# Altium PCB Microneedle_Patch_Mirrored - Copy.PcbDoc
Units mil, origin at the board's own origin, x right, y up, seen from the top; angles counter-clockwise.
Board outline 1133.86 x 3661.42 mil, 2 copper layers (Top, Bottom), stack 5.394 mil thick; 33 components, 33 nets, 708 pads, 44 vias.
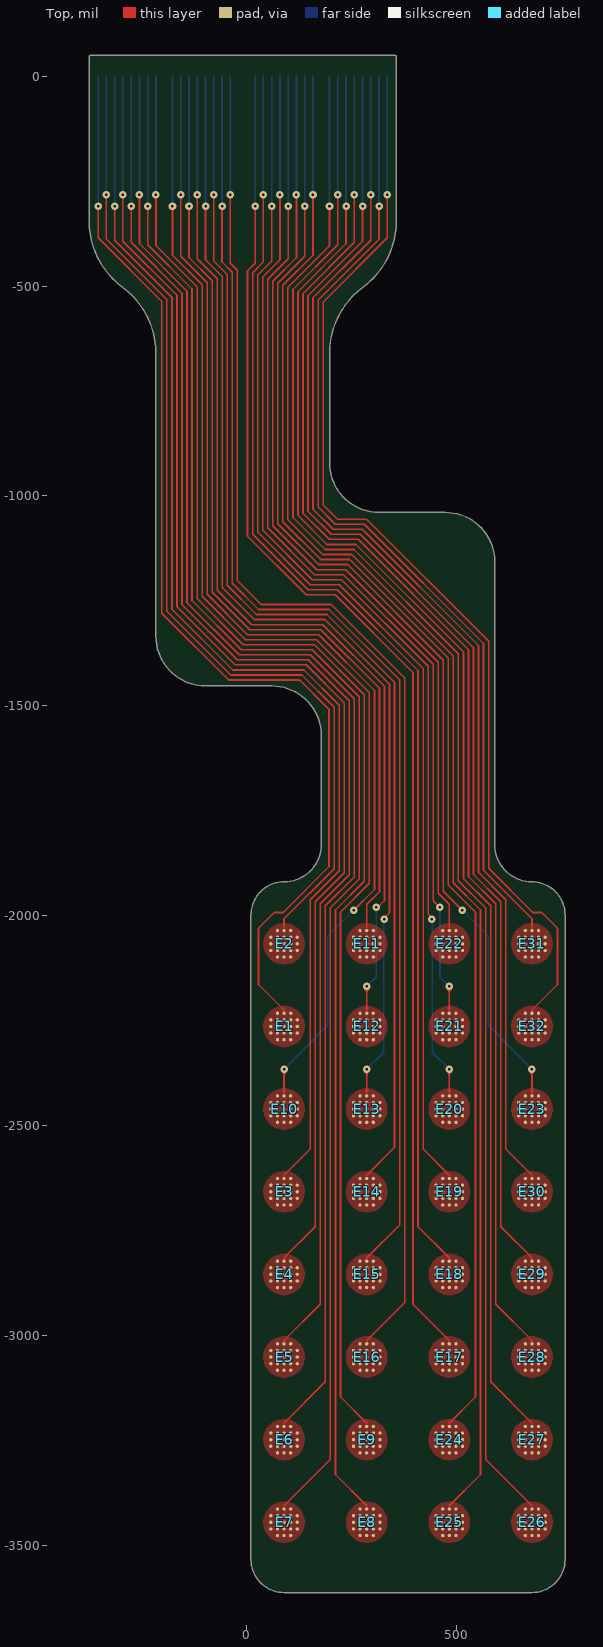
[diagram p0: Top view]
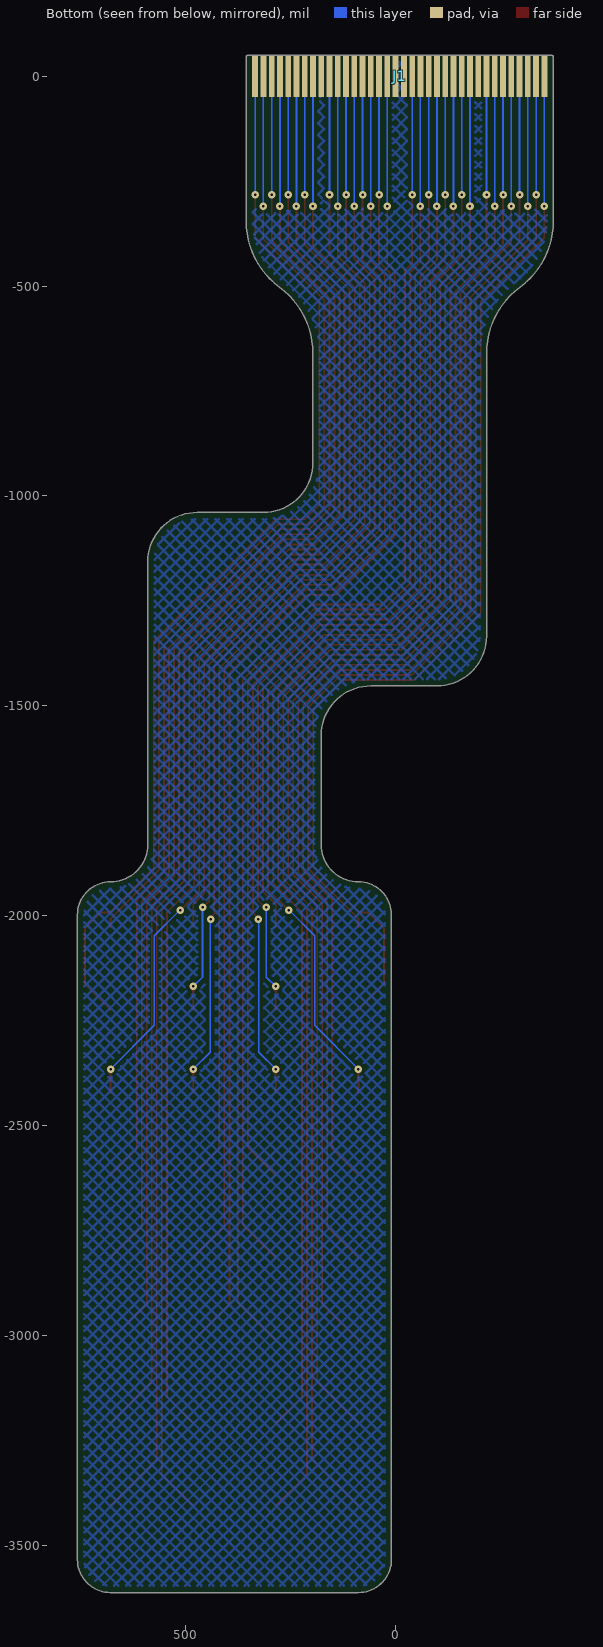
[diagram p1: Bottom view, seen from below]
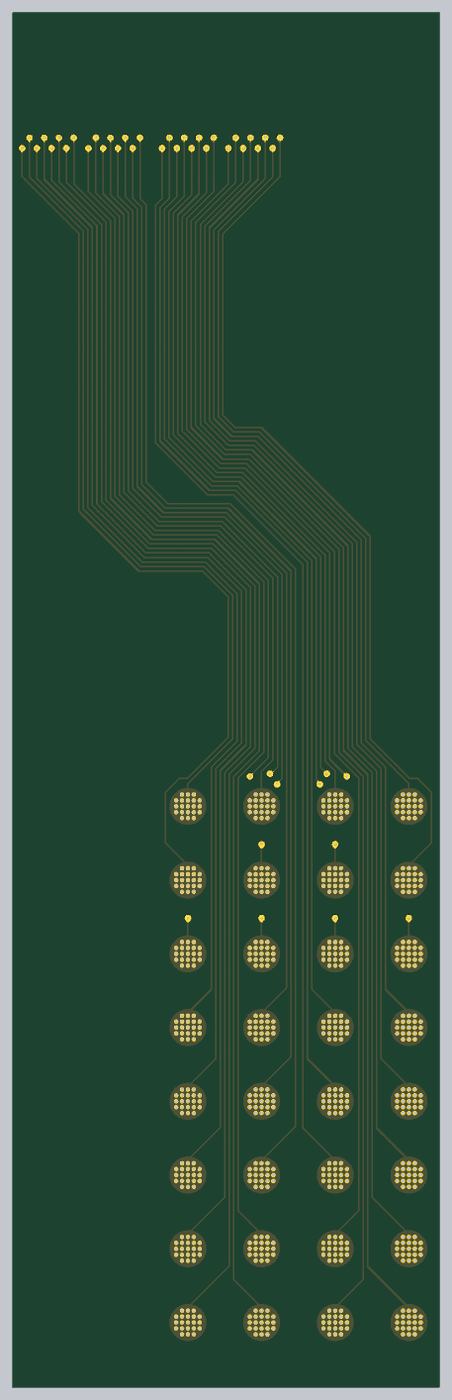
[diagram p2: 3D render of the assembled board from above, using the file's embedded part models]

## Layer stack, top to bottom
Board Layer Stack Top Coverlay: solder mask 0.9843, Polymide, Dk 3.4
Adhesive 3: prepreg 0.9843, Adhesive, Dk 3.3
Top: signal copper 0.7087
Dielectric 1: core 0.5118, Composite dielectric, Dk 3.3
Dielectric 3: core 0.9843, Polymide, Dk 3.4
Dielectric 2: core 0.5118, Composite dielectric, Dk 3.3
Bottom: signal copper 0.7087
Adhesive 2: prepreg 0.9843, Adhesive, Dk 3.3
Board Layer Stack Bottom Coverlay: solder mask 0.9843, Polymide, Dk 3.4

## Board outline
88.58,-3612.2 cw(c88.58,-3533.46) 9.84,-3533.46 9.84,-1998.03 cw(c88.58,-1998.03) 88.58,-1919.29 ccw(c88.58,-1830.71) 177.17,-1830.71 177.17,-1570.62 ccw(c59.06,-1570.62) 59.06,-1452.51 -98.43,-1452.51 cw(c-98.43,-1334.39) -216.54,-1334.39 -216.54,-660.92 ccw(c-413.39,-660.92) -296.26,-502.7 cw(c-179.13,-344.49) -375.98,-344.49 -375.98,45.28 cw(c-372.05,45.28) -372.05,49.21 352.36,49.21 cw(c352.36,45.28) 356.3,45.28 356.3,-344.49 cw(c159.45,-344.49) 276.57,-502.7 ccw(c393.7,-660.92) 196.85,-660.92 196.85,-921.01 ccw(c314.96,-921.01) 314.96,-1039.12 472.44,-1039.12 cw(c472.44,-1157.23) 590.55,-1157.23 590.55,-1830.71 ccw(c679.13,-1830.71) 679.13,-1919.29 cw(c679.13,-1998.03) 757.87,-1998.03 757.87,-3533.46 cw(c679.13,-3533.46) 679.13,-3612.2

## Design rules (kind name [scope] priority, off if disabled: settings)
BoardOutlineClearance ZIF_BoardEdge [InPadClass('ZIF_Pads')] p1: gap=12 ignorepadtopadclearanceinfootprint=FALSE except(0: SMDPad-OutlineEdge)
BoardOutlineClearance [All] p2: gap=12 ignorepadtopadclearanceinfootprint=FALSE
Clearance [All] p1: gap=8 ignorepadtopadclearanceinfootprint=TRUE except(5: Arc-SMDPad Track-SMDPad SMDPad-SMDPad)
ComponentClearance [All] p1: gap=4 collisioncheckmode=3 verticalgap=4 showdistances=FALSE
HoleSize [All] p1: absolutevalues=TRUE maxlimit=1000 minlimit=4 maxpercent=80.000 minpercent=20.000
HoleToHoleClearance [All] p1: gap=10 allowstackedmicrovias=FALSE
MinimumSolderMaskSliver [All] p1: minsoldermaskwidth=3.94
PlaneClearance [All] p1: clearance=6
PlaneConnect [All] p1: pad.planeconnectstyle=Relief pad.reliefexpansion=20 pad.reliefentries=4 pad.reliefconductorwidth=10 pad.reliefairgap=10 via.planeconnectstyle=Direct via.reliefexpansion=20 via.reliefentries=4 via.reliefconductorwidth=10 via.reliefairgap=10
PolygonConnect [All] p1: thpad.connectstyle=Relief thpad.reliefconductorwidth=10 thpad.reliefentries=4 thpad.polygonreliefangle="90 Angle" thpad.airgapwidth=10 smdpad.connectstyle=Direct smdpad.reliefconductorwidth=10 smdpad.reliefentries=4 smdpad.polygonreliefangle="90 Angle" smdpad.airgapwidth=10 via.connectstyle=Direct via.reliefconductorwidth=10 via.reliefentries=4 via.polygonreliefangle="90 Angle" via.airgapwidth=10
RoutingVias [All] p1: holewidth=6 width=18 viastyle="Through Hole" minholewidth=6 minwidth=18 maxholewidth=6 maxwidth=18
SilkToSilkClearance [All] p1: silktosilkclearance=4
SilkToSolderMaskClearance [IsPad] p1: minsilkscreentomaskgap=2 clearancetoexposedcopper=FALSE
SolderMaskExpansion [All] p1: expansion=2 istentingtop=FALSE
SupplyNets "Schematic Supply Nets" [InNet('GND')] p1: voltage=0.000
Width [All] p1: maxlimit=4 minlimit=4 preferedwidth=4 minimp=50.000000 maximp=50.000000 favimp=50.000000
22 further rules are at their usual default settings.

## Classes and differential pairs
pad class ZIF_Pads: J1-1 J1-2 J1-3 J1-4 J1-5 J1-6 J1-7 J1-8 J1-9 J1-10 J1-11 J1-12 J1-13 J1-14 J1-15 J1-16 J1-17 J1-18 J1-19 J1-20 J1-21 J1-22 J1-23 J1-24 J1-25 J1-26 J1-27 J1-28 J1-29 J1-30 J1-31 J1-32 J1-33 J1-34 J1-35 J1-36
component class Main: E1 E2 E4 E6 E27

## Components (designator, comment, footprint, x,y, rotation, side; value= is the part's Value field where it differs from the comment)
E1 "2.5 mm" PCBComponent_1 88.58,-2263.78 r0 top
E2 "2.5 mm" PCBComponent_1 88.58,-2066.93 r0 top
E3 "2.5 mm" PCBComponent_1 88.58,-2657.48 r0 top
E4 "2.5 mm" PCBComponent_1 88.58,-2854.33 r0 top
E5 "2.5 mm" PCBComponent_1 88.58,-3051.18 r0 top
E6 "2.5 mm" PCBComponent_1 88.58,-3248.03 r0 top
E7 "2.5 mm" PCBComponent_1 88.58,-3444.88 r0 top
E8 "2.5 mm" PCBComponent_1 285.43,-3444.88 r0 top
E9 "2.5 mm" PCBComponent_1 285.43,-3248.03 r0 top
E10 "2.5 mm" PCBComponent_1 88.58,-2460.63 r0 top
E11 "2.5 mm" PCBComponent_1 285.43,-2066.93 r0 top
E12 "2.5 mm" PCBComponent_1 285.43,-2263.78 r0 top
E13 "2.5 mm" PCBComponent_1 285.43,-2460.63 r0 top
E14 "2.5 mm" PCBComponent_1 285.43,-2657.48 r0 top
E15 "2.5 mm" PCBComponent_1 285.43,-2854.33 r0 top
E16 "2.5 mm" PCBComponent_1 285.43,-3051.18 r0 top
E17 "2.5 mm" PCBComponent_1 482.28,-3051.18 r0 top
E18 "2.5 mm" PCBComponent_1 482.28,-2854.33 r0 top
E19 "2.5 mm" PCBComponent_1 482.28,-2657.48 r0 top
E20 "2.5 mm" PCBComponent_1 482.28,-2460.63 r0 top
E21 "2.5 mm" PCBComponent_1 482.28,-2263.78 r0 top
E22 "2.5 mm" PCBComponent_1 482.28,-2066.93 r0 top
E23 "2.5 mm" PCBComponent_1 679.13,-2460.63 r0 top
E24 "2.5 mm" PCBComponent_1 482.28,-3248.03 r0 top
E25 "2.5 mm" PCBComponent_1 482.28,-3444.88 r0 top
E26 "2.5 mm" PCBComponent_1 679.13,-3444.88 r0 top
E27 "2.5 mm" PCBComponent_1 679.13,-3248.03 r0 top
E28 "2.5 mm" PCBComponent_1 679.13,-3051.18 r0 top
E29 "2.5 mm" PCBComponent_1 679.13,-2854.33 r0 top
E30 "2.5 mm" PCBComponent_1 679.13,-2657.48 r0 top
E31 "2.5 mm" PCBComponent_1 679.13,-2066.93 r0 top
E32 "2.5 mm" PCBComponent_1 679.13,-2263.78 r0 top
J1 "XF2M-3615-1A" CONN_FPC_2X18_0MM5 -9.84,0 r0 bottom

## Footprints (in the part's own frame and the unit in brackets; to place one, negate y for a bottom-side part, rotate by r counter-clockwise, add the part's x,y. Pads: shape width x height; smd on the part's side, far side on the other; paste and mask are expansions set on the pad)
CONN_FPC_2X18_0MM5 [mm] "Compatible with XF2M-3615-1A / 0.5 mm pitch, 2X18"
  rect 0.35x2.5 smd mask+0: 1(-8.75,0) 2(-8.25,0) 3(-7.75,0) 4(-7.25,0) 5(-6.75,0) 6(-6.25,0) 7(-5.75,0) 8(-5.25,0) 9(-4.75,0) 10(-4.25,0) 11(-3.75,0) 12(-3.25,0) 13(-2.75,0) 14(-2.25,0) 15(-1.75,0) 16(-1.25,0) 17(-0.75,0) 18(-0.25,0) 19(0.25,0) 20(0.75,0) 21(1.25,0) 22(1.75,0) 23(2.25,0) 24(2.75,0) 25(3.25,0) 26(3.75,0) 27(4.25,0) 28(4.75,0) 29(5.25,0) 30(5.75,0) 31(6.25,0) 32(6.75,0) 33(7.25,0) 34(7.75,0) 35(8.25,0) 36(8.75,0)
PCBComponent_1 [mm]
  round 0.2 smd paste+0 mask+0.05: 1(-0.8,-0.4) 1(-0.8,0) 1(-0.8,0.4) 1(-0.4,-0.8) 1(-0.4,-0.4) 1(-0.4,0) 1(-0.4,0.4) 1(-0.4,0.8) 1(0,-0.8) 1(0,-0.4) 1(0,0) 1(0,0.4) 1(0,0.8) 1(0.4,-0.8) 1(0.4,-0.4) 1(0.4,0) 1(0.4,0.4) 1(0.4,0.8) 1(0.8,-0.4) 1(0.8,0) 1(0.8,0.4)
  body extent -0.82,-0.82 0.82,0.82, height 0.4

## Part data
E1 E2 E3 E4 E5 E6 E7 E8 E9 E10 E11 E12 E13 E14 E15 E16 E17 E18 E19 E20 E21 E22 E23 E24 E25 E26 E27 E28 E29 E30 E31 E32: library part SENSE_UNEEDLE, "Microneedle electrode - 2.5 mm diameter"
J1: library part CONN_FPC_2X18_0MM5, "FPC Connector - FPC Side. 0.5 mm pitch / Compatible with XF2M-3615-1A", GRAMS Lib Spec=2.7

## Via types
v1: diameter 18, hole 6, Top to Bottom, 44 vias

## Nets (pads, with @x,y where several pads share a name; then routed paths per layer and width w, separated by ;. In a path a pad name is that pad's centre, name@x,y a point inside that pad or via, vN(x,y) a via of type N, cw(c..) or ccw(c..) an arc to the next point about the centre after c; other vN are vias at no path point)
GND: J1.9 J1.18 J1.19 J1.28
Input1: E1.1 J1.1 | length 2658.7
  Top w4: v1(-354.33,-310.2) -354.33,-385.26 -202.54,-537.05 -202.54,-1279.11 -43.14,-1438.51 126.17,-1438.51 191.87,-1504.2 195.84,-1508.17 195.84,-1882.9 86.5,-1992.24 65.27,-1992.24 27.84,-2029.67 27.84,-2163.67 88.58,-2224.41
  Bottom w4: v1(-354.33,-310.2) J1.1
Input2: E2.1 J1.2 | length 2400.9
  Top w4: v1(-334.65,-282.2) -334.65,-387.97 -190.54,-532.08 -190.54,-1274.14 -38.17,-1426.51 131.15,-1426.51 207.86,-1503.22 207.86,-1887.85 88.58,-2007.13 88.58,-2027.56
  Bottom w4: v1(-334.65,-282.2) J1.2
Input3: E3.1 J1.3 | length 2993.2
  Top w4: v1(-314.96,-310.2) -314.96,-390.69 -178.54,-527.11 -178.54,-1269.17 -33.2,-1414.51 136.12,-1414.51 219.86,-1498.25 219.86,-1892.82 151.01,-1961.67 151.01,-2555.69 88.58,-2618.11
  Bottom w4: v1(-314.96,-310.2) J1.3
Input4: E4.1 J1.4 | length 3191.8
  Top w4: v1(-295.28,-282.2) -295.28,-393.4 -166.54,-522.14 -166.54,-1264.2 -28.23,-1402.51 141.09,-1402.51 231.86,-1493.28 231.86,-1897.79 163.01,-1966.64 163.01,-2740.54 88.58,-2814.96
  Bottom w4: v1(-295.28,-282.2) J1.4
Input5: E5.1 J1.5 | length 3390.5
  Top w4: v1(-275.59,-310.2) -275.59,-396.12 -154.54,-517.17 -154.54,-1259.23 -23.26,-1390.51 146.06,-1390.51 243.86,-1488.31 243.86,-1902.76 175.01,-1971.61 175.01,-2925.39 88.58,-3011.81
  Bottom w4: v1(-275.59,-310.2) J1.5
Input6: E6.1 J1.6 | length 3589.1
  Top w4: v1(-255.91,-282.2) -255.91,-387.97 -255.91,-398.83 -142.54,-512.2 -142.54,-1254.26 -18.29,-1378.51 151.03,-1378.51 255.86,-1483.34 255.86,-1907.73 187.01,-1976.58 187.01,-3110.24 88.58,-3208.66
  Bottom w4: v1(-255.91,-282.2) J1.6
Input7: E7.1 J1.7 | length 3787.8
  Top w4: v1(-236.22,-310.2) -236.22,-390.69 -236.22,-401.55 -130.54,-507.23 -130.54,-1249.29 -13.32,-1366.51 156,-1366.51 267.86,-1478.37 267.86,-1912.7 199.01,-1981.56 199.01,-3295.09 88.58,-3405.51
  Bottom w4: v1(-236.22,-310.2) J1.7
Input8: E8.1 J1.8 | length 3769.7
  Top w4: v1(-216.54,-282.2) -216.54,-404.26 -118.54,-502.26 -118.54,-1244.32 -8.35,-1354.51 160.97,-1354.51 279.86,-1473.4 279.86,-1917.68 211.01,-1986.53 211.01,-3331.09 285.43,-3405.51
  Bottom w4: v1(-216.54,-282.2) J1.8
Input9: E9.1 J1.10 | length 3556.5
  Top w4: v1(-177.17,-310.2) -177.17,-426.66 -106.54,-497.29 -106.54,-1239.35 -3.38,-1342.51 165.94,-1342.51 291.86,-1468.42 291.86,-1922.65 223.01,-1991.5 223.01,-3146.24 285.43,-3208.66
  Bottom w4: v1(-177.17,-310.2) J1.10
Input10: E10.1 J1.11 | length 2801.5
  Top w4: v1(-157.48,-282.2) -157.48,-429.38 -94.54,-492.32 -94.54,-1234.38 1.59,-1330.51 170.91,-1330.51 303.86,-1463.45 303.86,-1937.52 v1(254.46,-1986.92) ; 88.58,-2421.26 88.58,-2365.46 v1(88.84,-2365.2)
  Bottom w4: v1(-157.48,-282.2) J1.11 ; v1(88.84,-2365.2) 192.84,-2261.2 192.84,-2047.75 254.06,-1986.53 v1(254.46,-1986.92)
Input11: E11.1 J1.12 | length 2327.3
  Top w4: v1(-137.8,-310.2) -137.8,-432.09 -82.54,-487.35 -82.54,-1229.41 6.56,-1318.51 175.88,-1318.51 315.86,-1458.48 315.86,-1942.49 285.43,-1972.91 285.43,-2027.56
  Bottom w4: v1(-137.8,-310.2) J1.12
Input12: E12.1 J1.13 | length 2528
  Top w4: v1(-118.11,-282.2) -118.11,-434.8 -70.54,-482.38 -70.54,-1224.44 11.53,-1306.51 180.85,-1306.51 327.86,-1453.51 327.86,-1963.79 311.44,-1980.2 v1(307.84,-1980.2) ; 285.43,-2224.41 285.43,-2168.61 v1(285.69,-2168.35)
  Bottom w4: v1(-118.11,-282.2) J1.13 ; v1(285.69,-2168.35) 307.84,-2146.2 v1(307.84,-1980.2)
Input13: E13.1 J1.14 | length 2723.7
  Top w4: v1(-98.43,-310.2) -98.43,-437.52 -58.54,-477.41 -58.54,-1218.02 17.95,-1294.51 185.82,-1294.51 339.86,-1448.54 339.86,-1992.98 326.84,-2005.99 v1(326.84,-2008.2) ; 285.43,-2421.26 285.43,-2365.46 v1(285.69,-2365.2)
  Bottom w4: v1(-98.43,-310.2) J1.14 ; v1(285.69,-2365.2) 325.84,-2325.06 325.84,-2009.2 v1(326.84,-2008.2)
Input14: E14.1 J1.15 | length 2922.3
  Top w4: v1(-78.74,-282.2) -78.74,-440.23 -46.54,-472.44 -46.54,-1213.05 22.92,-1282.51 190.79,-1282.51 351.86,-1443.57 351.86,-2551.69 285.43,-2618.11
  Bottom w4: v1(-78.74,-282.2) J1.15
Input15: E15.1 J1.16 | length 3121
  Top w4: v1(-59.06,-310.2) -59.06,-442.95 -34.54,-467.47 -34.54,-1208.08 27.89,-1270.51 195.76,-1270.51 363.86,-1438.6 363.86,-1582.2 363.86,-2736.54 285.43,-2814.96
  Bottom w4: v1(-59.06,-310.2) J1.16
Input16: E16.1 J1.17 | length 3318.6
  Top w4: v1(-39.37,-282.2) -39.37,-445.66 -22.54,-462.5 -22.54,-1201.46 34.51,-1258.51 200.73,-1258.51 375.86,-1433.63 375.86,-1582.2 375.86,-2921.39 285.43,-3011.81
  Bottom w4: v1(-39.37,-282.2) J1.17
Input17: E17.1 J1.20 | length 3258.8
  Top w4: v1(19.69,-310.2) 19.69,-445.66 1.7,-463.65 1.7,-1095.99 141.24,-1235.53 210.39,-1235.53 395.84,-1420.98 395.84,-1582.2 395.84,-2925.37 482.28,-3011.81
  Bottom w4: v1(19.69,-310.2) J1.20
Input18: E18.1 J1.21 | length 3060.2
  Top w4: v1(39.37,-282.2) 39.37,-442.95 13.7,-468.62 13.7,-1091.02 146.21,-1223.53 215.36,-1223.53 407.84,-1416.01 407.84,-1582.2 407.84,-2740.52 482.28,-2814.96
  Bottom w4: v1(39.37,-282.2) J1.21
Input19: E19.1 J1.22 | length 2861.6
  Top w4: v1(59.06,-310.2) 59.06,-440.23 25.7,-473.59 25.7,-1086.05 151.18,-1211.53 220.33,-1211.53 419.84,-1411.04 419.84,-2555.67 482.28,-2618.11
  Bottom w4: v1(59.06,-310.2) J1.22
Input20: E20.1 J1.23 | length 2662.6
  Top w4: v1(78.74,-282.2) 78.74,-437.52 37.7,-478.56 37.7,-1081.08 156.15,-1199.53 225.3,-1199.53 431.84,-1406.07 431.84,-1996.02 440.87,-2005.05 v1(440.87,-2008.2) ; 482.28,-2421.26 v1@482.28,-2365.46
  Bottom w4: v1(78.74,-282.2) J1.23 ; v1(440.87,-2008.2) 441.87,-2009.2 441.87,-2325.06 v1(482.02,-2365.2)
Input21: E21.1 J1.24 | length 2463.9
  Top w4: v1(98.43,-310.2) 98.43,-434.8 49.7,-483.53 49.7,-1076.11 161.12,-1187.53 230.27,-1187.53 443.84,-1401.1 443.84,-1964.17 v1(459.87,-1980.2) ; 482.28,-2224.41 v1@482.28,-2168.61
  Bottom w4: v1(98.43,-310.2) J1.24 ; v1(459.87,-1980.2) 459.87,-2146.2 v1(482.02,-2168.35)
Input22: E22.1 J1.25 | length 2265.6
  Top w4: v1(118.11,-282.2) 118.11,-432.09 61.7,-488.5 61.7,-1071.14 166.09,-1175.53 235.24,-1175.53 455.84,-1396.13 455.84,-1946.47 482.28,-1972.91 482.28,-2027.56
  Bottom w4: v1(118.11,-282.2) J1.25
Input23: E23.1 J1.26 | length 2739.5
  Top w4: v1(137.8,-310.2) 137.8,-429.38 73.7,-493.47 73.7,-1066.17 171.06,-1163.53 240.21,-1163.53 467.84,-1391.16 467.84,-1941.5 v1(513.26,-1986.92) ; 679.13,-2421.26 v1@679.13,-2365.46
  Bottom w4: v1(137.8,-310.2) J1.26 ; v1(513.26,-1986.92) 513.65,-1986.53 574.87,-2047.75 574.87,-2261.2 v1(678.87,-2365.2)
Input24: E24.1 J1.27 | length 3494.9
  Top w4: v1(157.48,-282.2) 157.48,-426.66 85.7,-498.44 85.7,-1061.2 176.03,-1151.53 245.18,-1151.53 479.84,-1386.19 479.84,-1926.63 544.71,-1991.5 544.71,-3146.24 482.28,-3208.66
  Bottom w4: v1(157.48,-282.2) J1.27
Input25: E25.1 J1.29 | length 3708
  Top w4: v1(196.85,-310.2) 196.85,-404.26 97.7,-503.41 97.7,-1056.23 181,-1139.53 250.15,-1139.53 491.84,-1381.22 491.84,-1921.66 556.71,-1986.53 556.71,-3331.09 482.28,-3405.51
  Bottom w4: v1(196.85,-310.2) J1.29
Input26: E26.1 J1.30 | length 3726.1
  Top w4: v1(216.54,-282.2) 216.54,-401.55 109.7,-508.38 109.7,-1051.26 185.97,-1127.53 255.12,-1127.53 503.84,-1376.25 503.84,-1916.69 568.71,-1981.56 568.71,-3295.09 679.13,-3405.51
  Bottom w4: v1(216.54,-282.2) J1.30
Input27: E27.1 J1.31 | length 3527.5
  Top w4: v1(236.22,-310.2) 236.22,-398.83 121.7,-513.35 121.7,-1046.29 190.94,-1115.53 260.09,-1115.53 515.84,-1371.28 515.84,-1911.72 580.71,-1976.58 580.71,-3110.24 679.13,-3208.66
  Bottom w4: v1(236.22,-310.2) J1.31
Input28: E28.1 J1.32 | length 3326.1
  Top w4: 255.91,-396.12 133.7,-518.32 133.7,-1041.32 195.91,-1103.53 265.06,-1103.53 527.84,-1366.31 527.84,-1906.75 592.71,-1971.61 592.71,-2925.39 679.13,-3011.81 ; 255.91,-393.4 v1(255.91,-282.2)
  Bottom w4: v1(255.91,-282.2) J1.32
Input29: E29.1 J1.33 | length 3130.2
  Top w4: v1(275.59,-310.2) 275.59,-393.4 145.7,-523.29 145.7,-1036.34 200.88,-1091.53 270.03,-1091.53 539.84,-1361.34 539.84,-1901.78 604.71,-1966.64 604.71,-2740.54 679.13,-2814.96
  Bottom w4: v1(275.59,-310.2) J1.33
Input30: E30.1 J1.34 | length 2931.6
  Top w4: v1(295.28,-282.2) 295.28,-390.69 157.7,-528.26 157.7,-1031.37 205.86,-1079.53 275,-1079.53 551.84,-1356.37 551.84,-1896.81 616.71,-1961.67 616.71,-2555.69 679.13,-2618.11
  Bottom w4: v1(295.28,-282.2) J1.34
Input31: E31.1 J1.35 | length 2339.2
  Top w4: v1(314.96,-310.2) 314.96,-387.97 169.7,-533.23 169.7,-1026.4 210.83,-1067.53 279.97,-1067.53 563.84,-1351.4 563.84,-1891.84 679.13,-2007.13 679.13,-2027.56
  Bottom w4: v1(314.96,-310.2) J1.35
Input32: E32.1 J1.36 | length 2597.1
  Top w4: v1(334.65,-282.2) 334.65,-385.26 181.7,-538.2 181.7,-1021.43 215.8,-1055.53 284.95,-1055.53 575.84,-1346.43 575.84,-1886.87 681.22,-1992.24 702.44,-1992.24 739.87,-2029.67 739.87,-2163.67 679.13,-2224.41
  Bottom w4: v1(334.65,-282.2) J1.36

## Polygon pours and split planes (outlines as drawn)
Input31 on Top "Electrode31" (solid, pour order 5): 679.13,-2017.72 cw(c679.13,-2066.93) 728.35,-2066.93 cw(c679.13,-2066.93) 679.13,-2116.14 cw(c679.13,-2066.93) 629.92,-2066.93 cw(c679.13,-2066.93)
Input18 on Top "Electrode18" (solid, pour order 27): 482.28,-2805.12 cw(c482.28,-2854.33) 531.5,-2854.33 cw(c482.28,-2854.33) 482.28,-2903.54 cw(c482.28,-2854.33) 433.07,-2854.33 cw(c482.28,-2854.33)
Input26 on Top "Electrode26" (solid, pour order 28): 679.13,-3395.67 cw(c679.13,-3444.88) 728.35,-3444.88 cw(c679.13,-3444.88) 679.13,-3494.09 cw(c679.13,-3444.88) 629.92,-3444.88 cw(c679.13,-3444.88)
Input32 on Top "Electrode32" (solid, pour order 0): 679.13,-2214.57 cw(c679.13,-2263.78) 728.35,-2263.78 cw(c679.13,-2263.78) 679.13,-2312.99 cw(c679.13,-2263.78) 629.92,-2263.78 cw(c679.13,-2263.78)
Input16 on Top "Electrode16" (solid, pour order 31): 285.43,-3001.97 cw(c285.43,-3051.18) 334.65,-3051.18 cw(c285.43,-3051.18) 285.43,-3100.39 cw(c285.43,-3051.18) 236.22,-3051.18 cw(c285.43,-3051.18)
Input14 on Top "Electrode14" (solid, pour order 23): 285.43,-2608.27 cw(c285.43,-2657.48) 334.65,-2657.48 cw(c285.43,-2657.48) 285.43,-2706.69 cw(c285.43,-2657.48) 236.22,-2657.48 cw(c285.43,-2657.48)
Input25 on Top "Electrode25" (solid, pour order 29): 482.28,-3395.67 cw(c482.28,-3444.88) 531.5,-3444.88 cw(c482.28,-3444.88) 482.28,-3494.09 cw(c482.28,-3444.88) 433.07,-3444.88 cw(c482.28,-3444.88)
Input1 on Top "Electrode1" (solid, pour order 4): 88.58,-2214.57 cw(c88.58,-2263.78) 137.8,-2263.78 cw(c88.58,-2263.78) 88.58,-2312.99 cw(c88.58,-2263.78) 39.37,-2263.78 cw(c88.58,-2263.78)
Input19 on Top "Electrode19" (solid, pour order 22): 482.28,-2608.27 cw(c482.28,-2657.48) 531.5,-2657.48 cw(c482.28,-2657.48) 482.28,-2706.69 cw(c482.28,-2657.48) 433.07,-2657.48 cw(c482.28,-2657.48)
Input12 on Top "Electrode12" (solid, pour order 15): 285.43,-2214.57 cw(c285.43,-2263.78) 334.65,-2263.78 cw(c285.43,-2263.78) 285.43,-2312.99 cw(c285.43,-2263.78) 236.22,-2263.78 cw(c285.43,-2263.78)
Input11 on Top "Electrode11" (solid, pour order 10): 285.43,-2017.72 cw(c285.43,-2066.93) 334.65,-2066.93 cw(c285.43,-2066.93) 285.43,-2116.14 cw(c285.43,-2066.93) 236.22,-2066.93 cw(c285.43,-2066.93)
Input9 on Top "Electrode9" (solid, pour order 3): 285.43,-3198.82 cw(c285.43,-3248.03) 334.65,-3248.03 cw(c285.43,-3248.03) 285.43,-3297.24 cw(c285.43,-3248.03) 236.22,-3248.03 cw(c285.43,-3248.03)
Input3 on Top "Electrode3" (solid, pour order 9): 88.58,-2608.27 cw(c88.58,-2657.48) 137.8,-2657.48 cw(c88.58,-2657.48) 88.58,-2706.69 cw(c88.58,-2657.48) 39.37,-2657.48 cw(c88.58,-2657.48)
Input4 on Top "Electrode4" (solid, pour order 16): 88.58,-2805.12 cw(c88.58,-2854.33) 137.8,-2854.33 cw(c88.58,-2854.33) 88.58,-2903.54 cw(c88.58,-2854.33) 39.37,-2854.33 cw(c88.58,-2854.33)
Input5 on Top "Electrode5" (solid, pour order 17): 88.58,-3001.97 cw(c88.58,-3051.18) 137.8,-3051.18 cw(c88.58,-3051.18) 88.58,-3100.39 cw(c88.58,-3051.18) 39.37,-3051.18 cw(c88.58,-3051.18)
Input6 on Top "Electrode6" (solid, pour order 24): 88.58,-3198.82 cw(c88.58,-3248.03) 137.8,-3248.03 cw(c88.58,-3248.03) 88.58,-3297.24 cw(c88.58,-3248.03) 39.37,-3248.03 cw(c88.58,-3248.03)
Input7 on Top "Electrode7" (solid, pour order 25): 88.58,-3395.67 cw(c88.58,-3444.88) 137.8,-3444.88 cw(c88.58,-3444.88) 88.58,-3494.09 cw(c88.58,-3444.88) 39.37,-3444.88 cw(c88.58,-3444.88)
Input8 on Top "Electrode8" (solid, pour order 32): 285.43,-3395.67 cw(c285.43,-3444.88) 334.65,-3444.88 cw(c285.43,-3444.88) 285.43,-3494.09 cw(c285.43,-3444.88) 236.22,-3444.88 cw(c285.43,-3444.88)
Input15 on Top "Electrode15" (solid, pour order 26): 285.43,-2805.12 cw(c285.43,-2854.33) 334.65,-2854.33 cw(c285.43,-2854.33) 285.43,-2903.54 cw(c285.43,-2854.33) 236.22,-2854.33 cw(c285.43,-2854.33)
Input2 on Top "Electrode2" (solid, pour order 8): 88.58,-2017.72 cw(c88.58,-2066.93) 137.8,-2066.93 cw(c88.58,-2066.93) 88.58,-2116.14 cw(c88.58,-2066.93) 39.37,-2066.93 cw(c88.58,-2066.93)
Input20 on Top "Electrode20" (solid, pour order 14): 482.28,-2411.42 cw(c482.28,-2460.63) 531.5,-2460.63 cw(c482.28,-2460.63) 482.28,-2509.84 cw(c482.28,-2460.63) 433.07,-2460.63 cw(c482.28,-2460.63)
Input21 on Top "Electrode21" (solid, pour order 19): 482.28,-2214.57 cw(c482.28,-2263.78) 531.5,-2263.78 cw(c482.28,-2263.78) 482.28,-2312.99 cw(c482.28,-2263.78) 433.07,-2263.78 cw(c482.28,-2263.78)
Input22 on Top "Electrode22" (solid, pour order 11): 482.28,-2017.72 cw(c482.28,-2066.93) 531.5,-2066.93 cw(c482.28,-2066.93) 482.28,-2116.14 cw(c482.28,-2066.93) 433.07,-2066.93 cw(c482.28,-2066.93)
Input23 on Top "Electrode23" (solid, pour order 6): 679.13,-2411.42 cw(c679.13,-2460.63) 728.35,-2460.63 cw(c679.13,-2460.63) 679.13,-2509.84 cw(c679.13,-2460.63) 629.92,-2460.63 cw(c679.13,-2460.63)
Input13 on Top "Electrode13" (solid, pour order 18): 285.43,-2411.42 cw(c285.43,-2460.63) 334.65,-2460.63 cw(c285.43,-2460.63) 285.43,-2509.84 cw(c285.43,-2460.63) 236.22,-2460.63 cw(c285.43,-2460.63)
Input10 on Top "Electrode10" (solid, pour order 7): 88.58,-2411.42 cw(c88.58,-2460.63) 137.8,-2460.63 cw(c88.58,-2460.63) 88.58,-2509.84 cw(c88.58,-2460.63) 39.37,-2460.63 cw(c88.58,-2460.63)
Input29 on Top "Electrode29" (solid, pour order 13): 679.13,-2805.12 cw(c679.13,-2854.33) 728.35,-2854.33 cw(c679.13,-2854.33) 679.13,-2903.54 cw(c679.13,-2854.33) 629.92,-2854.33 cw(c679.13,-2854.33)
Input30 on Top "Electrode30" (solid, pour order 12): 679.13,-2608.27 cw(c679.13,-2657.48) 728.35,-2657.48 cw(c679.13,-2657.48) 679.13,-2706.69 cw(c679.13,-2657.48) 629.92,-2657.48 cw(c679.13,-2657.48)
Input24 on Top "Electrode24" (solid, pour order 2): 482.28,-3198.82 cw(c482.28,-3248.03) 531.5,-3248.03 cw(c482.28,-3248.03) 482.28,-3297.24 cw(c482.28,-3248.03) 433.07,-3248.03 cw(c482.28,-3248.03)
Input28 on Top "Electrode28" (solid, pour order 20): 679.13,-3001.97 cw(c679.13,-3051.18) 728.35,-3051.18 cw(c679.13,-3051.18) 679.13,-3100.39 cw(c679.13,-3051.18) 629.92,-3051.18 cw(c679.13,-3051.18)
Input27 on Top "Electrode27" (solid, pour order 21): 679.13,-3198.82 cw(c679.13,-3248.03) 728.35,-3248.03 cw(c679.13,-3248.03) 679.13,-3297.24 cw(c679.13,-3248.03) 629.92,-3248.03 cw(c679.13,-3248.03)
Input17 on Top "Electrode17" (solid, pour order 30): 482.28,-3001.97 cw(c482.28,-3051.18) 531.5,-3051.18 cw(c482.28,-3051.18) 482.28,-3100.39 cw(c482.28,-3051.18) 433.07,-3051.18 cw(c482.28,-3051.18)
no net on Layer0 "Default Coverlay 1 Bottom" (split plane): 176 vertices, not listed, extent 9.84,-3612.2 1222.44,49.21
GND on Bottom "GND_BOT" (hatched 45Degree grid 20 track 6, remove dead copper, pour order 34): 403.54,75.8 -482.16,75.8 -482.16,-466.2 -338.16,-610.2 -338.16,-1364.2 -240.16,-1462.2 91.84,-1462.2 169.84,-1540.2 169.84,-1872.2 131.84,-1910.2 45.84,-1910.2 7.84,-1948.2 7.84,-3566.2 55.84,-3614.2 755.84,-3614.2 755.84,-3246.2 755.84,-1958.2 592.55,-1794.91 592.55,-1102.91 469.84,-980.2 340.44,-980.2 236.22,-875.98 236.22,-669.29 403.54,-501.97
no net on Layer0 "Default Coverlay 1 Top" (split plane): 176 vertices, not listed, extent -454.72,-3612.2 757.87,49.21

## Silkscreen, mask and mechanical layers (free items; w line width, h text height)
Board Outline:
  circle w7.87: c383.86,-3612.2 r1.97
  lines w7.87: -375.98,-344.49 ccw(c-179.13,-344.49) -296.26,-502.7 cw(c-413.39,-660.92) -216.54,-660.92 -216.54,-1334.39 ccw(c-98.43,-1334.39) -98.43,-1452.51 59.06,-1452.51 cw(c59.06,-1570.62) 177.17,-1570.62 177.17,-1830.71 cw(c88.58,-1830.71) 88.58,-1919.29 ccw(c88.58,-1998.03) 9.84,-1998.03 9.84,-3533.46 ccw(c88.58,-3533.46) 88.58,-3612.2 679.13,-3612.2 ccw(c679.13,-3533.46) 757.87,-3533.46 757.87,-1998.03 ccw(c679.13,-1998.03) 679.13,-1919.29 cw(c679.13,-1830.71) 590.55,-1830.71 590.55,-1157.23 ccw(c472.44,-1157.23) 472.44,-1039.12 314.96,-1039.12 cw(c314.96,-921.01) 196.85,-921.01 196.85,-660.92 cw(c393.7,-660.92) 276.57,-502.7 ccw(c159.45,-344.49) 356.3,-344.49 356.3,45.28 ccw(c352.36,45.28) 352.36,49.21 -372.05,49.21 ccw(c-372.05,45.28) -375.98,45.28 -375.98,-344.49
Manufacturing Notes:
  lines w10: 1192.36,-2603.15 3842.36,-2603.15 3842.36,-2453.15 1192.36,-2453.15 1192.36,-2303.15 3842.36,-2303.15 3842.36,-2153.15 1192.36,-2153.15 1192.36,-2003.15 3842.36,-2003.15 3842.36,-1853.15 1192.36,-1853.15 1192.36,-1703.15 3842.36,-1703.15 3842.36,-1553.15 1192.36,-1553.15 1192.36,-1403.15 3842.36,-1403.15 3842.36,-1353.15 ; 3542.36,-2753.15 3542.36,-1103.15 ; 3542.36,-953.15 3542.36,-1103.15 ; 3842.36,-1253.15 1192.36,-1253.15 1192.36,-1103.15 ; 1192.36,-1103.15 1742.36,-1103.15 ; 1192.36,-1103.15 1192.36,-953.15 3842.36,-953.15 3842.36,-1103.15 ; 1192.36,-1103.15 1192.36,-2753.15 3842.36,-2753.15 3842.36,-1103.15 ; 1192.36,-1103.15 3842.36,-1103.15 ; 1742.36,-1103.15 1742.36,-953.15 2242.36,-953.15 2242.36,-1103.15 ; 1742.36,-1103.15 1742.36,-2753.15 2242.36,-2753.15 2242.36,-1103.15 ; 2242.36,-1103.15 2642.36,-1103.15 ; 2242.36,-1103.15 2642.36,-1103.15 ; 2642.36,-1103.15 2642.36,-953.15 3192.36,-953.15 3192.36,-1103.15 ; 2642.36,-1103.15 2642.36,-2753.15 3192.36,-2753.15 3192.36,-1103.15 ; 3192.36,-1103.15 3542.36,-1103.15 ; 3192.36,-1103.15 3542.36,-1103.15 ; 3542.36,-1103.15 3842.36,-1103.15
  text "STIFFFENER:" at 458,8 h40
  text "MATERIAL: POLYMIDE (PI)" at 508,-92 h40
  text "SIDE: TOP SIDE OF FPC" at 508,-192 h40
  text "STIFFENER AREA: DEFINED BY \"STIFFENER\" MECHANICAL LAYER" at 508,-292 h40
  text "STIFFENER SHALL COVER THE ENTIRE DEFINED AREA" at 508,-392 h40
  text "ALIGN STIFFENER EDGES WITH THE DEFINED STIFFENER OUTLINE" at 508,-492 h40
  text "FINAL FPC THICKNESS IN ZIF CONTACT REGION: 0.3 MM" at 508,-592 h40
  text "Type" at 1352.36,-1041.88 h60
  text "Material" at 1882.36,-1041.88 h60
  text "Weight" at 2362.36,-1041.88 h60
  text "Dk" at 3342.36,-1041.88 h60
  text "Thickness" at 2782.36,-1043.15 h60
  text "Df" at 3672.36,-1043.76 h60
  text "0.088 mm" at 2787.36,-1198.67 h60
  text "3.4" at 3337.36,-1198.67 h60
  text "Polymide" at 1887.36,-1200 h60
  text "0.015" at 3637.36,-1199.33 h60
  text "Bottom Stiffener" at 1254.09,-1209.93 h60
  text "0.025 mm" at 2797.36,-1351.22 h60
  text "Adhesive" at 1264.09,-1362.54 h60
  text "Polymide" at 1887.36,-1484.33 h60
  text "0.025 mm" at 2787.36,-1494.93 h60
  text "0.015" at 3637.36,-1494.93 h60
  text "Top Coverlay" at 1254.09,-1495.6 h60
  text "3.4" at 3337.36,-1495.6 h60
  text "0.025 mm" at 2787.36,-1644.93 h60
  text "Adhesive" at 1254.09,-1656.26 h60
  text "0.018 mm" at 2787.36,-1794.93 h60
  text "Top Layer" at 1254.09,-1795.6 h60
  text "0.5 oz" at 2337.36,-1806.2 h60
  text "0.013 mm" at 2787.36,-1944.93 h60
  text "Adhesive" at 1254.09,-1956.26 h60
  text "0.025 mm" at 2787.36,-2094.93 h60
  text "3.4" at 3337.36,-2094.93 h60
  text "0.015" at 3637.36,-2095.6 h60
  text "Polymide" at 1887.36,-2096.27 h60
  text "Core" at 1254.09,-2106.2 h60
  text "0.013 mm" at 2787.36,-2244.93 h60
  text "Adhesive" at 1254.09,-2256.26 h60
  text "0.5 oz" at 2349.33,-2390.48 h60
  text "0.018 mm" at 2787.36,-2394.93 h60
  text "Bottom Layer" at 1254.09,-2395.6 h60
  text "0.025 mm" at 2787.36,-2544.93 h60
  text "Adhesive" at 1254.09,-2556.26 h60
  text "Polymide" at 1887.36,-2685 h60
  text "0.025 mm" at 2787.36,-2694.93 h60
  text "3.4" at 3337.36,-2694.93 h60
  text "Bottom Coverlay" at 1254.09,-2695.6 h60
  text "0.015" at 3637.36,-2695.6 h60
  text "Finished thickness (with stiffener): 0.30 mm nominal" at 1212.6,-2842.13 h60
  text "Finished thickness (without stiffener): 0.187 mm nominal" at 1212.6,-2920.87 h60
  text "Substrate Finish: ENEPIG" at 1212.6,-2999.61 h60
  text "Thickness of Immersion Gold: 4U\"" at 1212.6,-3077.68 h60
Board Shape:
  circle w7.87: c383.86,-3612.2 r1.97
  lines w7.87: -375.98,-344.49 ccw(c-179.13,-344.49) -296.26,-502.7 cw(c-413.39,-660.92) -216.54,-660.92 -216.54,-1334.39 ccw(c-98.43,-1334.39) -98.43,-1452.51 59.06,-1452.51 cw(c59.06,-1570.62) 177.17,-1570.62 177.17,-1830.71 cw(c88.58,-1830.71) 88.58,-1919.29 ccw(c88.58,-1998.03) 9.84,-1998.03 9.84,-3533.46 ccw(c88.58,-3533.46) 88.58,-3612.2 679.13,-3612.2 ccw(c679.13,-3533.46) 757.87,-3533.46 757.87,-1998.03 ccw(c679.13,-1998.03) 679.13,-1919.29 cw(c679.13,-1830.71) 590.55,-1830.71 590.55,-1157.23 ccw(c472.44,-1157.23) 472.44,-1039.12 314.96,-1039.12 cw(c314.96,-921.01) 196.85,-921.01 196.85,-660.92 cw(c393.7,-660.92) 276.57,-502.7 ccw(c159.45,-344.49) 356.3,-344.49 356.3,45.28 ccw(c352.36,45.28) 352.36,49.21 -372.05,49.21 ccw(c-372.05,45.28) -375.98,45.28 -375.98,-344.49
Stiffener:
  lines w7.87: -375.98,-127.95 356.3,-127.95 356.3,49.21 -375.98,49.21 -375.98,-127.95